# Altium PCB CAN Breakout.PcbDoc
Units mil, origin at the board's own origin, x right, y up, seen from the top; angles counter-clockwise.
Board outline 2734 x 2570 mil, 2 copper layers (Top Layer, Bottom Layer); 51 components, 25 nets, 122 pads, 33 vias.
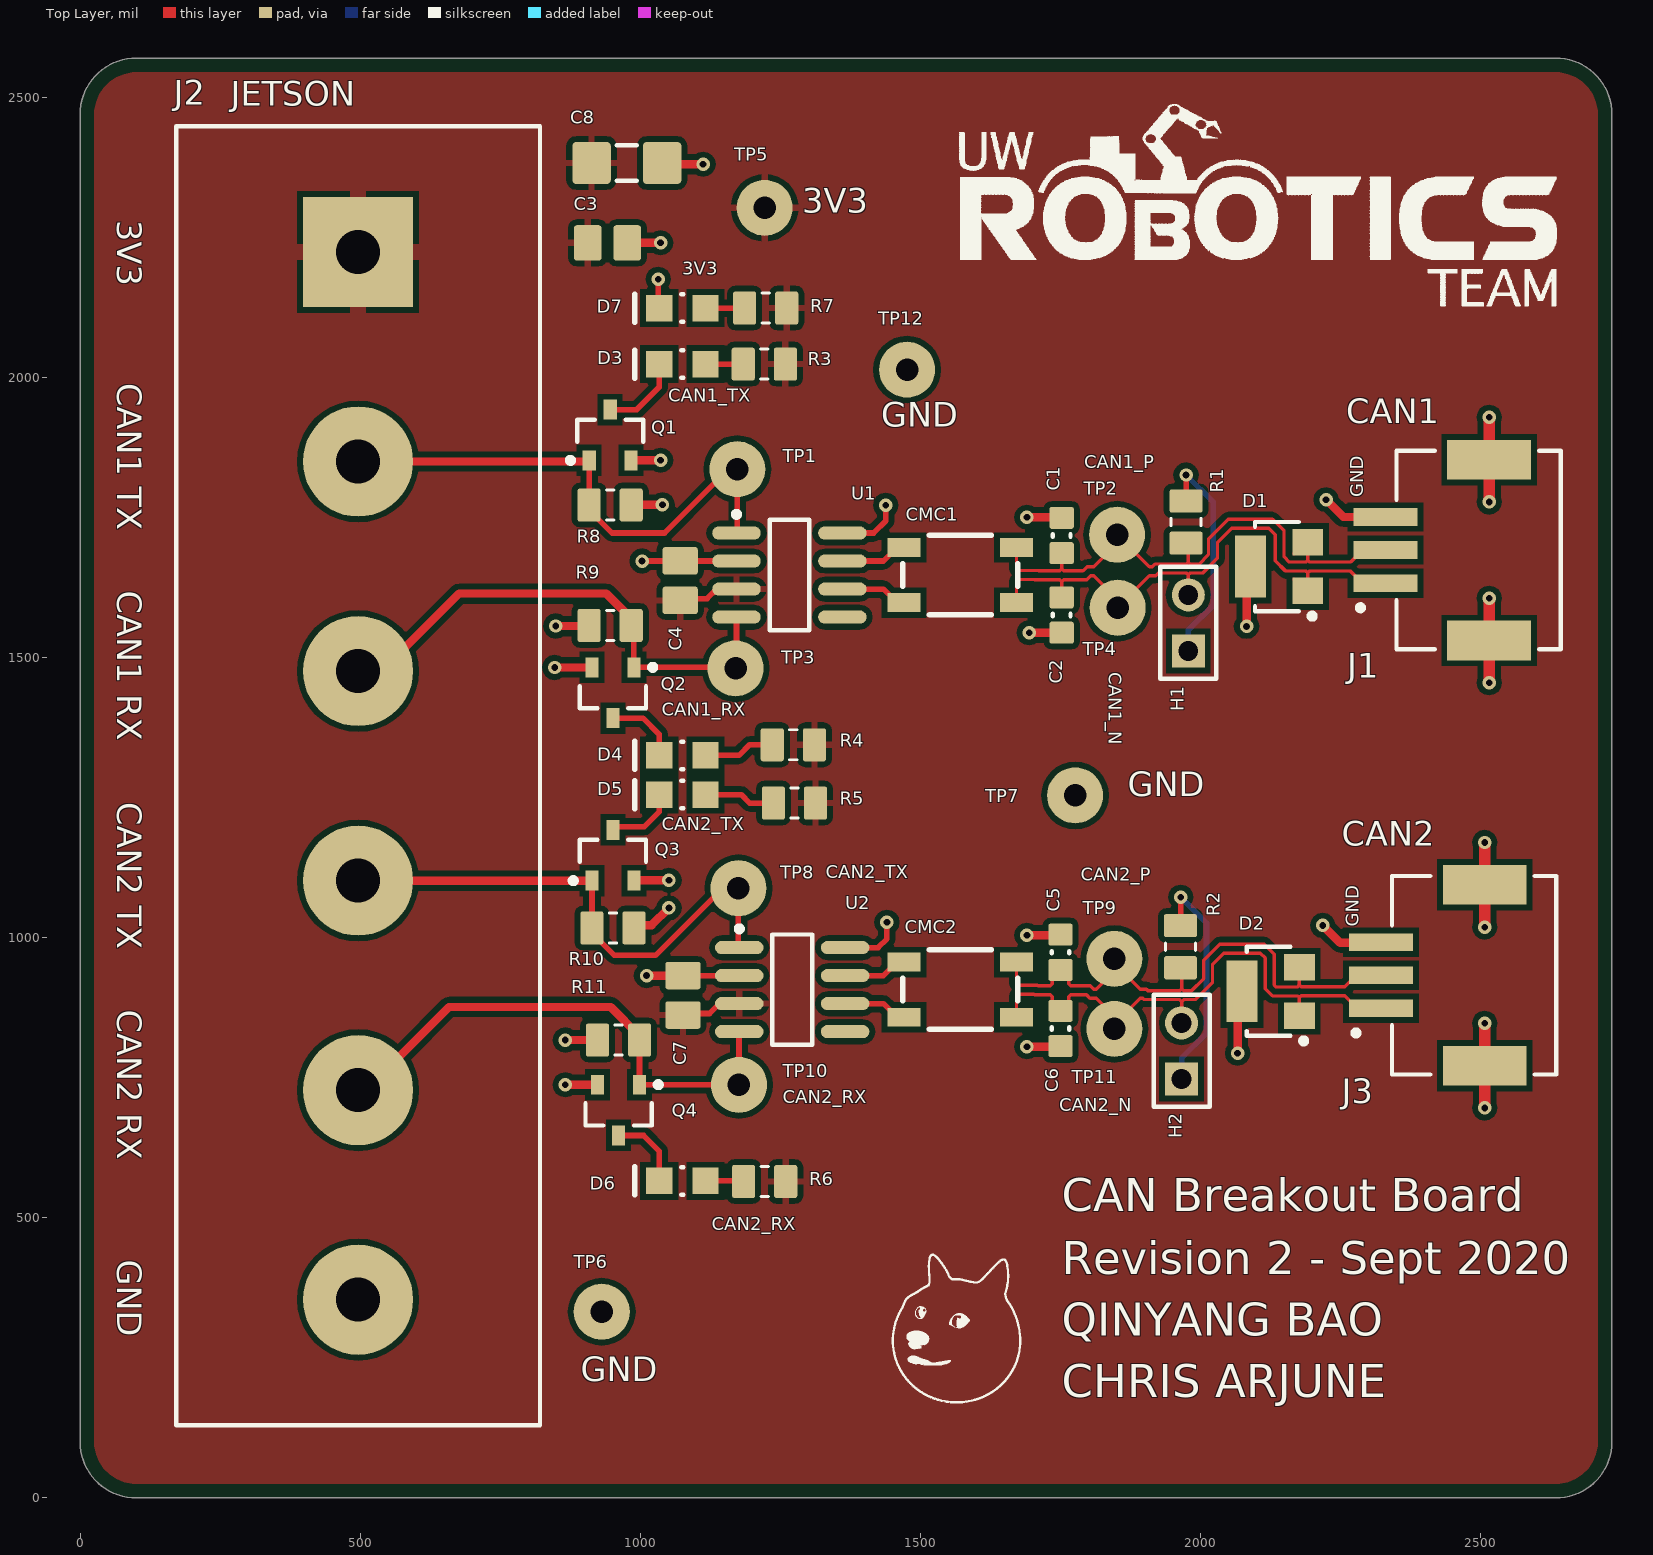
[diagram p0: Top Layer view]
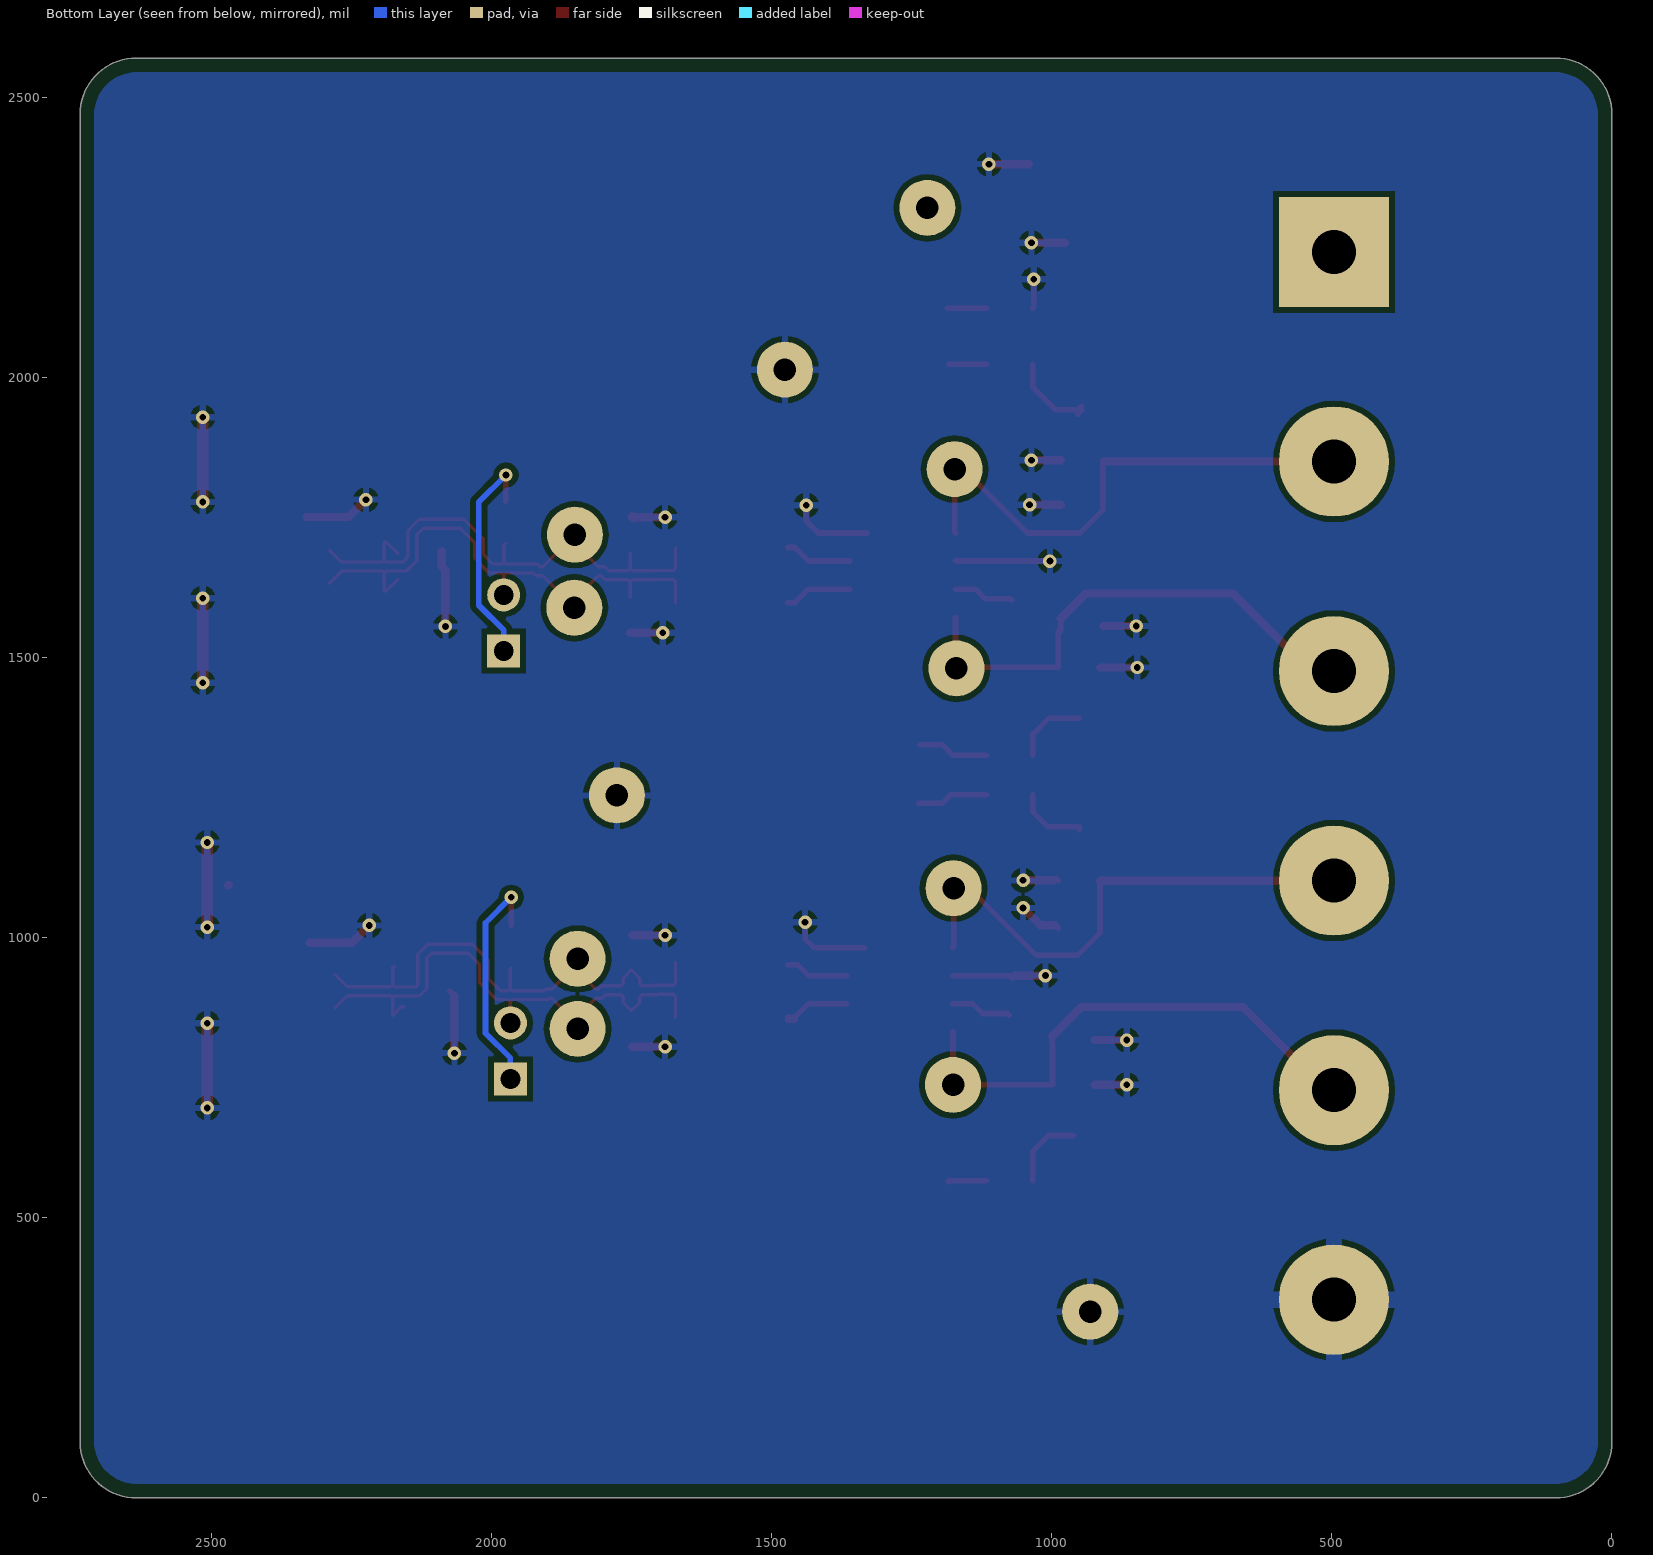
[diagram p1: Bottom Layer view, seen from below]
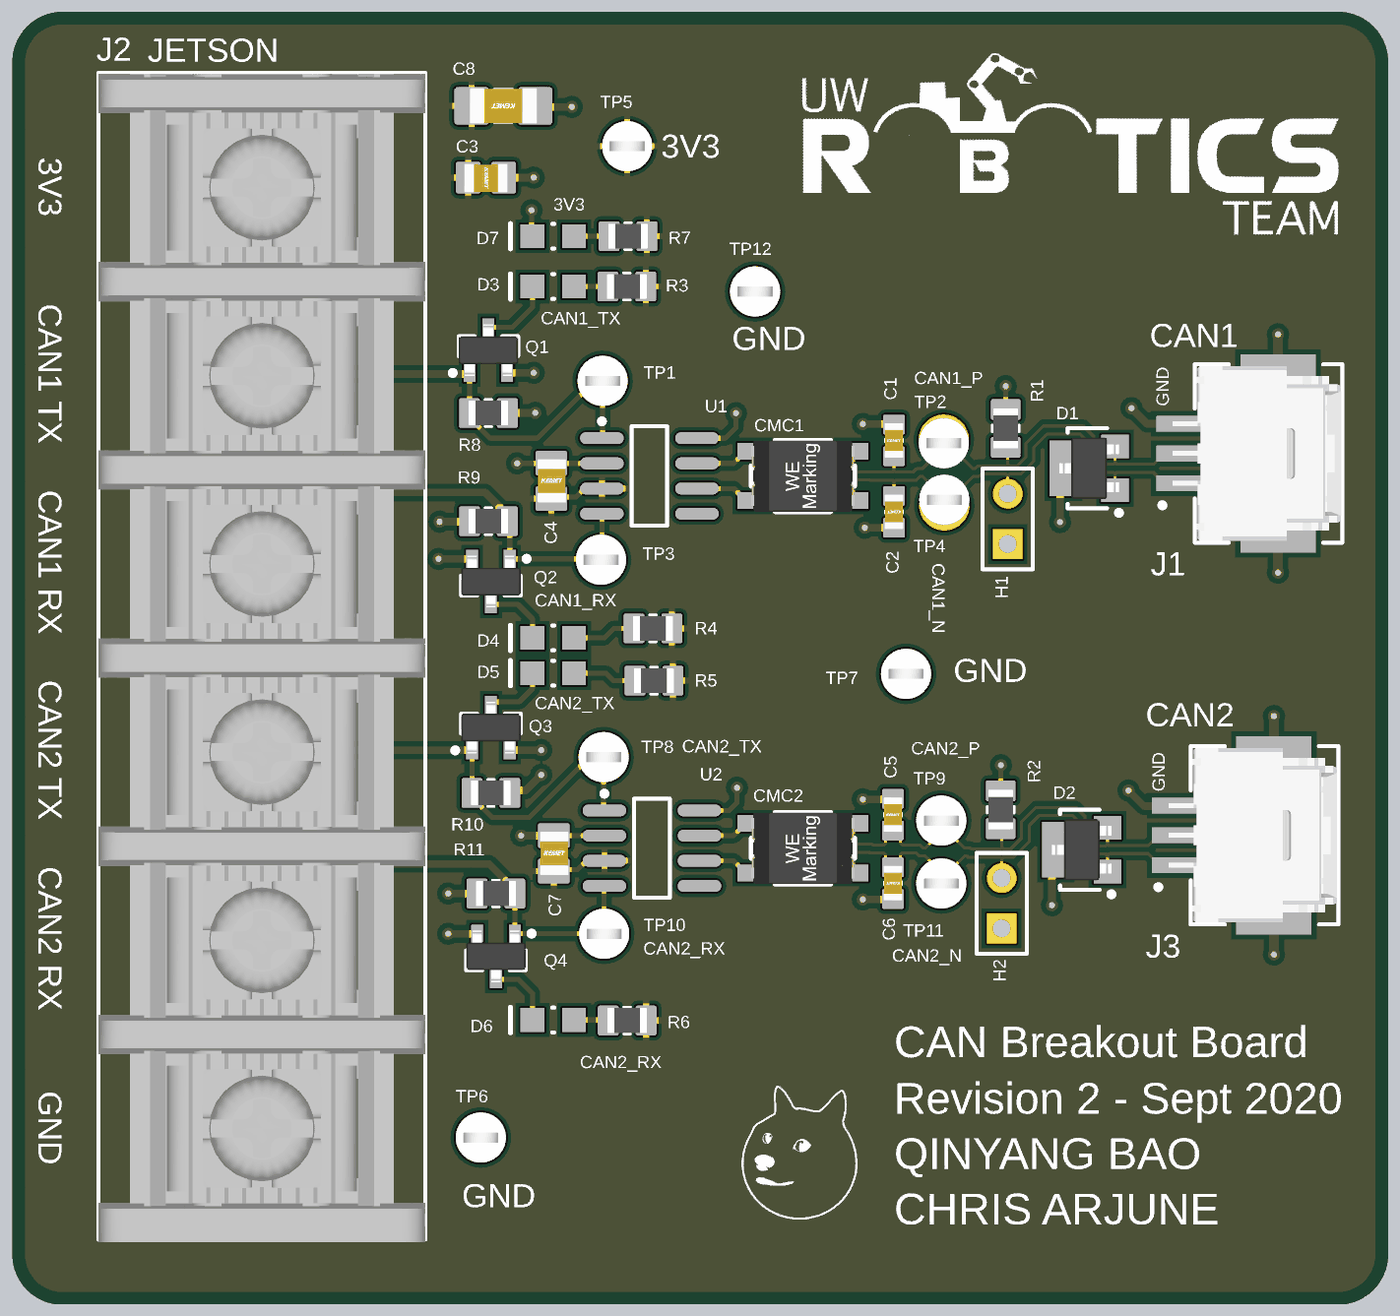
[diagram p2: 3D render of the assembled board from above, using the file's embedded part models]

## Layer stack, top to bottom
Top Solder: solder mask 0.4, Solder Resist, Dk 3.5
Top Layer: signal copper 1.4
Dielectric 1: dielectric 12.6, FR-4, Dk 4.8
Bottom Layer: signal copper 1.4
Bottom Solder: solder mask 0.4, Solder Resist, Dk 3.5

## Board outline
0,100 ccw(c100,100) 100,0 2634,0 ccw(c2634,100) 2734,100 2734,2470 ccw(c2634,2470) 2634,2570 100,2570 ccw(c100,2470) 0,2470

## Design rules (kind name [scope] priority, off if disabled: settings)
BoardOutlineClearance [All] p1: gap=25 ignorepadtopadclearanceinfootprint=FALSE except(0: Arc-SplitContinuation Track-SplitContinuation SMDPad-SplitContinuation THPad-SplitContinuation Via-SplitContinuation Fill-SplitContinuation Poly-SplitContinuation Region-SplitContinuation Text-SplitContinuation)
Clearance [All] p1: gap=10 ignorepadtopadclearanceinfootprint=FALSE except(0: Arc-Hole Track-Hole SMDPad-Hole THPad-Hole Via-Hole Fill-Hole Poly-Hole Region-Hole Text-Hole)
DiffPairsRouting [All] p1: maxlimit=10 minlimit=10 mostfreqgap=10 toplayer_minwidth=6 toplayer_maxwidth=6 toplayer_prefwidth=6 bottomlayer_minwidth=6 bottomlayer_maxwidth=6 bottomlayer_prefwidth=6 maxuncoupledlength=500
PolygonConnect PolygonConnect_J2 [InComponent('J2')] p1: connectstyle=Relief reliefconductorwidth=30 reliefentries=4 polygonreliefangle="90 Angle" airgapwidth=10
PolygonConnect [All] p2: connectstyle=Relief reliefconductorwidth=12 reliefentries=4 polygonreliefangle="90 Angle" airgapwidth=10
RoutingVias [All] p1: holewidth=28 width=50 viastyle="Through Hole" minholewidth=28 minwidth=50 maxholewidth=28 maxwidth=50
SilkToSilkClearance [All] p1: silktosilkclearance=2
SilkToSolderMaskClearance [IsPad] p1: minsilkscreentomaskgap=2 clearancetoexposedcopper=TRUE
SolderMaskExpansion [All] p1: expansion=4
Width [All] p1: maxlimit=100 minlimit=6 preferedwidth=10 minimp=50.000000 maximp=50.000000 favimp=50.000000
27 further rules are at their usual default settings.

## Classes and differential pairs
differential pair CAN2: +CAN2_P -CAN2_N
differential pair CAN1: +CAN1_P -CAN1_N

## Components (designator, comment, footprint, x,y, rotation, side; value= is the part's Value field where it differs from the comment)
C1 "CAP_33pF_50V_0603" CAPC0603(1608)55_N 1752,1718 r270 top value=33pF
C2 "CAP_33pF_50V_0603" CAPC0603(1608)55_N 1752,1576 r90 top value=33pF
C3 "0.1μF" CAPC2012X140N 941.24,2240.39 r180 top value=0.1µF
C4 "0.1μF" CAPC2012X140N 1071,1637.39 r270 top value=0.1µF
C5 "CAP_33pF_50V_0603" CAPC0603(1608)55_N 1750,974 r270 top value=33pF
C6 "CAP_33pF_50V_0603" CAPC0603(1608)55_N 1750,838 r90 top value=33pF
C7 "0.1μF" CAPC2012X140N 1076,897.15 r270 top value=0.1µF
C8 "10uF" CAPC1206(3216) 975.79,2382.89 r180 top value=10µF
CMC1 "*" 744212510 1571,1647.39 r0 top
CMC2 "*" 744212510 1571,907.39 r0 top
D1 "TVS_DIODE_CAN" TVS_DIODE_CAN 2140,1662.6 r180 top
D2 "TVS_DIODE_CAN" TVS_DIODE_CAN 2125,904.39 r180 top
D3 "LG R971-KN-1" LED_0805_LINE 1074.88,2023.89 r180 top
D4 "LS R976-NR-1" LED_0805_LINE 1074.88,1325.39 r180 top
D5 "LG R971-KN-1" LED_0805_LINE 1074.88,1255.39 r180 top
D6 "LS R976-NR-1" LED_0805_LINE 1074.88,565.89 r180 top
D7 "LS R976-NR-1" LED_0805_LINE 1074.88,2123.89 r180 top
H1 "JUMPER_2" HDR1X2 1978,1512 r90 top
H2 "JUMPER_2" HDR1X2 1966,748 r90 top
J1 "*" MOLEX-5025850370 2496.34,1692 r90 top
J2 "TERMINAL_6" OSTYK51106030 496,2017.39 r270 top
J3 "*" MOLEX-5025850370 2488.34,933.06 r90 top
Q1 "NMOS_60V_470mA" SOT23-3 946,1897.39 r90 top
Q2 "NMOS_60V_470mA" SOT23-3 951,1437.39 r270 top
Q3 "NMOS_60V_470mA" SOT23-3 951,1147.11 r90 top
Q4 "NMOS_60V_470mA" SOT23-3 961,692.39 r270 top
R1 "120" RESC2012X60N 1974,1742 r90 top
R2 "120" RESC2012X60N 1964,984 r90 top
R3 "120" RESC2012X60N 1221.14,2023.89 r0 top
R4 "120" RESC2012X60N 1273,1344.39 r0 top
R5 "120" RESC2012X60N 1275,1240.39 r0 top
R6 "120" RESC2012X60N 1221.79,564.89 r0 top
R7 "120" RESC2012X60N 1223.54,2123.89 r0 top
R8 "120" RESC2012X60N 946,1772.39 r180 top
R9 "120" RESC2012X60N 946,1557.39 r0 top
R10 "120" RESC2012X60N 951,1017.39 r180 top
R11 "120" RESC2012X60N 961,817.39 r0 top
TP1 "TESTPOINT_LOOP" TESTPOINT_LOOP#1 1173,1836.39 r0 top
TP2 "TESTPOINT_LOOP" TESTPOINT_LOOP#2 1851,1712.39 r0 top
TP3 "TESTPOINT_LOOP" TESTPOINT_LOOP#1 1169.79,1480.89 r0 top
TP4 "TESTPOINT_LOOP" TESTPOINT_LOOP#3 1852,1600 r0 top
TP5 "TESTPOINT_LOOP" TESTPOINT_LOOP#1 1221.79,2302.89 r0 top
TP6 "TESTPOINT_LOOP" TESTPOINT_LOOP#1 931,332.39 r0 top
TP7 "TESTPOINT_LOOP" TESTPOINT_LOOP#1 1776,1254 r0 top
TP8 "TESTPOINT_LOOP" TESTPOINT_LOOP#1 1175,1088.39 r0 top
TP9 "TESTPOINT_LOOP" TESTPOINT_LOOP#1 1846,962.39 r0 top
TP10 "TESTPOINT_LOOP" TESTPOINT_LOOP#1 1176,737.39 r0 top
TP11 "TESTPOINT_LOOP" TESTPOINT_LOOP#1 1846,837.39 r0 top
TP12 "TESTPOINT_LOOP" TESTPOINT_LOOP#1 1476,2014 r0 top
U1 "IC TXRX CAN" LT-S8_N 1266,1647.39 r0 top
U2 "IC TXRX CAN" LT-S8_N 1271,907.39 r0 top

## Footprints (in the part's own frame and the unit in brackets; to place one, negate y for a bottom-side part, rotate by r counter-clockwise, add the part's x,y. Pads: shape width x height; smd on the part's side, far side on the other; paste and mask are expansions set on the pad)
744212510 [mm] "CMC HORIZONTAL 4 J-LEAD"
  rect 1.5x0.85 smd: 1(-2.55,-1.25) 3(-2.55,1.25) 4(2.55,1.25) 5(2.55,-1.25)
  silkscreen extent -2.6,-1.8 2.6,1.8, body extent -2.6,-1.8 2.6,1.8, height 1.67
CAPC0603(1608)55_N [mm] "Chip Capacitor, Body 1.6x0.8mm, Height 0.55mm, IPC Medium Density"
  rrect20% 1x1.1 smd: 1(-0.8,0) 2(0.8,0)
  silkscreen extent -0.05,-0.4 0.05,0.4, body extent -0.87,-0.48 0.88,0.48, height 0.87
CAPC1206(3216) [mm] "Chip Capacitor, Body 3.2x1.6mm, Height 0.55mm, IPC Medium Density"
  rrect20% 1.75x1.9 smd: 1(-1.6,0) 2(1.6,0)
  silkscreen extent -0.45,-0.8 0.45,0.8, body extent -1.7,-0.9 1.7,0.9, height 0.88
CAPC2012X140N [mm]
  rrect20% 1.25x1.6 smd: 1(-0.895,0) 2(0.895,0)
  body extent -1.1,-0.7 1.1,0.75, height 1.41
HDR1X2 [mm] "Connector; Header; 2 Position"
  rect 1.5x1.5 hole 0.9: 1(0,0)
  round 1.5 hole 0.9: 2(2.54,0)
  silkscreen extent -1.27,-1.27 3.81,1.27
LED_0805_LINE [mm] "SMD, 2-Leads, Body 2x1.25mm"
  rect 1.2x1.2 smd: 1(-1.05,0) 2(1.05,0)
  silkscreen extent -0.05,-0.63 2.16,0.64, body extent -1,-0.63 1,0.63, height 0.8
LT-S8_N [mm] "SOP, 8-Leads, Body 4.9x3.9mm, Pitch 1.27mm, IPC Medium Density"
  oval 2.2x0.6 smd: 1(-2.4,1.905) 2(-2.4,0.635) 3(-2.4,-0.635) 4(-2.4,-1.905) 5(2.4,-1.905) 6(2.4,-0.635) 7(2.4,0.635) 8(2.4,1.905)
  silkscreen extent -2.52,-2.5 0.9,2.88, body extent -2,-2.5 2,2.5, height 1.76
MOLEX-5025850370 [mm]
  rect 1.8x3.8 smd paste+0 mask+0: 0(-4.1,-0.475) 0(4.1,-0.475)
  rect 0.8x2.9 smd paste+0 mask+0: 1(-1.5,4.225) 2(0,4.225) 3(1.5,4.225)
  silkscreen extent -4.5,-3.72 4.5,5.48, body extent -4.4,-3.67 4.4,4.83, height 6.4
OSTYK51106030 [mm] "Connector; Header; 6 Position"
  rect 5x5 hole 2: 1(-5.25,0)
  round 5 hole 2: 2(4.25,0) 3(13.75,0) 4(23.25,0) 5(32.75,0) 6(42.25,0)
  silkscreen extent -10.95,-8.25 47.95,8.25, body extent -10.91,-8.25 48.09,8.25, height 18.49
RESC2012X60N [mm]
  rrect20% 1.05x1.5 smd: 1(-0.955,0) 2(0.955,0)
  silkscreen extent -0.17,-0.68 0.17,0.68, body extent -1,-0.62 1,0.62, height 0.6
SOT23-3 [mm] "SOT23, 3-Leads, Body 2.90x2.30mm, Pitch 0.95mm, IPC Medium Density"
  rect 0.9x0.6 smd: 1(-1.15,0.95) 2(-1.15,-0.95) 3(1.15,0)
  silkscreen extent -1.27,-1.5 0.7,1.92, body extent -1.3,-1.5 1.3,1.5, height 1.1
TESTPOINT_LOOP#1 [mm]
  round 2.54 hole 1.02: 1(0,0)
  body extent -1.27,-1.27 1.27,1.27, height 4.57
TESTPOINT_LOOP#2 [mm]
  round 2.54 hole 1.02: 1(0,0.178)
  body extent -1.27,-1.27 1.27,1.27, height 4.57
TESTPOINT_LOOP#3 [mm]
  round 2.54 hole 1.02: 1(0,-0.279)
  body extent -1.27,-1.27 1.27,1.27, height 4.57
TVS_DIODE_CAN [mm] "SOT23, 3-Leads, Body 2.95x2.80mm, Pitch 0.95mm, IPC Low Density"
  rect 1.4x1.2 smd: 1(-1.3,1.1) 2(-1.3,-1.1)
  rect 1.4x2.8 smd: 3(1.3,0)
  silkscreen extent -1.63,-2.02 1.09,2.37, body extent -1.5,-1.55 1.5,1.55, height 1.25

## Part data
C1 C2 C5 C6: "CAP CER 33PF 50V C0G/NP0", Case Code (Imperial)=0603, Case Code (Metric)=1608, Dielectric="C0G, NP0", Dielectric Material=Ceramic, Insulation Resistance=100GR, Manufacturer 1=Yageo, Manufacturer Part Number 1=CC0603JRNPO9BN330, Max Operating Temperature=125°C, Min Operating Temperature=-55°C, Supplier Part Number 1=311-1064-1-ND, Temperature Coefficient=30ppm/°C, Tolerance=5%, Voltage=50V, ComponentLink7Description=https://datasheet.ciiva.com/11464/upy-gp-np0-16v-to-50v-8-11464730.pdf?src-supplier=Avnet, ComponentLink7URL=https://datasheet.ciiva.com/11464/upy-gp-np0-16v-to-50v-8-11464730.pdf?src-supplier=Avnet, ComponentLink8Description=https://datasheet.ciiva.com/46430/1835847-46430155.pdf?src-supplier=Element14, ComponentLink8URL=https://datasheet.ciiva.com/46430/1835847-46430155.pdf?src-supplier=Element14, ComponentLink9Description=https://datasheet.ciiva.com/144/mlccorderingcode-144644.pdf?src-supplier=Digi-Key, ComponentLink9URL=https://datasheet.ciiva.com/144/mlccorderingcode-144644.pdf?src-supplier=Digi-Key, ComponentLink10Description=https://datasheet.ciiva.com/5426/upy-gp-np0-16v-to-50v-8-5426614.pdf?src-supplier=Mouser, ComponentLink10URL=https://datasheet.ciiva.com/5426/upy-gp-np0-16v-to-50v-8-5426614.pdf?src-supplier=Mouser, ComponentLink11Description=https://datasheet.ciiva.com/7978/1443161-7978142.pdf?src-supplier=Element14, ComponentLink11URL=https://datasheet.ciiva.com/7978/1443161-7978142.pdf?src-supplier=Element14, Composition=Ceramic, Depth=0.8mm, Height=0.8mm, Length=1.6mm, Mount="Surface Mount", Number of Pins=2, Package=0603, REACH SVHC="No SVHC", Supplier 1=Digi-Key, Termination=SMD/SMT, Thickness=0.035inch, Voltage Rating=50V, Voltage Rating (DC)=50V, Width=0.031inch
C3 C4 C7: library part CAP_0.1uF_50V_0805, "CAP CER 0.1UF 50V X7R 0805", Case Code (Imperial)=0805, Case Code (Metric)=2012, Dielectric=X7R, Manufacturer 1="Murata Electronics", Manufacturer Part Number 1=GCD21BR71H104KA01L, Max Operating Temperature=125°C, Min Operating Temperature=-55°C, Package="0805 (2012 Metric)", Ratings=AEC-Q200, Supplier Part Number 1=490-11955-1-ND, Tolerance=10%, Voltage Rating=50V, Depth=1.25mm, Height=1.25mm, Length=2mm, Mount="Surface Mount", Supplier 1=Digi-Key, Termination=SMD/SMT, Thickness=0.049inch, Width=0.049inch
C8: library part CAP_10uF_50V_1206, "CAP CER 10UF 50V X5R 1206", Case Code (Imperial)=1206, Case Code (Metric)=3216, Dielectric=X5R, Manufacturer 1=Murata, Manufacturer Part Number 1=GRT31CR61H106KE01L, Package="1206 (3216 Metric)", Supplier Part Number 1=490-12456-1-ND, Voltage Rating=50V, Dimensions="0.126\" L x 0.063\" W (3.20mm x 1.6mm)", Manufacturer Part Numer 1=GRT31CR61H106KE01L, Mount="Surface Mount", Supplier 1=Digi-Key
CMC1 CMC2: library part CMC_51uH, "CMC 51uH 300MA 2LN SMD", Case/Package=SMD/SMT, Current=300mA, DC Resistance (DCR)=160mR, Inductance=51uH, Inductance Tolerance=50%, Manufacturer 1="Wurth Electronics", Manufacturer Part Number 1=744212510, Max Operating Temperature=105°C, Min Operating Temperature=-40°C, Supplier Part Number 1=732-3941-1-ND, Test Frequency=100kHz, Voltage Rating (DC)=80V, ComponentLink7Description=https://datasheet.ciiva.com/6216/744212510-6216348.pdf?src-supplier=Digi-Key, ComponentLink7URL=https://datasheet.ciiva.com/6216/744212510-6216348.pdf?src-supplier=Digi-Key, ComponentLink8Description=https://datasheet.ciiva.com/7764/1735560-7764951.pdf?src-supplier=Element14, ComponentLink8URL=https://datasheet.ciiva.com/7764/1735560-7764951.pdf?src-supplier=Element14, Core Material=Ferrite, Current Rating=300mA, Depth=3.6mm, Height=1.65mm, Impedance=300R, Length=6.5mm, Max DC Current=300mA, Mount="Surface Mount", Number of Lines=2, Number of Pins=4, REACH SVHC="No SVHC", Supplier 1=Digi-Key, Termination=SMD/SMT, Tolerance=50%, Width=0.142inch
D1 D2: "TVS DIODE 24V 41V SOT323-3", Manufacturer 1="Nexperia USA Inc.", Manufacturer Part Number 1=PESD2CAN,215, Package="SC-70, SOT-323", Supplier Part Number 1=1727-3891-1-ND, Mount="Surface Mount", Supplier 1=Digi-Key
D3 D5: library part DIO_LED_G, "LED GREEN DIFFUSED 0805 SMD", Forward Voltage Drop=2.2V, Manufacturer 1=OSRAM, Package="0805 (2012 Metric)", Supplier Part Number 1=475-1410-1-ND, Manufacturer Part Number 1="LG R971-KN-1", Mount="Surface Mount", Supplier 1=Digi-Key
D4 D6 D7: library part DIO_LED_R, "LED RED DIFFUSED 0805 SMD", Forward Voltage Drop=2V, Manufacturer 1=OSRAM, Package="0805 (2012 Metric)", Supplier Part Number 1=475-1278-1-ND, Manufacturer Part Number 1="LS R976-NR-1", Mount="Surface Mount", Supplier 1=Digi-Key
H1 H2: "HEADER 2X1", Manufacturer 1="TE Connectivity", Manufacturer Part Number 1=87220-2, Supplier Part Number 1=A26542-ND, Mount="Through Hole", Supplier 1=Digi-Key
J1 J3: "CONN RCPT 3POS 0.059 TIN SMD R/A", Color=Beige, Contact Resistance=20mR, Current Rating=2A, Manufacturer 1=Molex, Max Operating Temperature=85°C, Min Operating Temperature=-40°C, Supplier Part Number 1=WM12831CT-ND, Voltage Rating=100V, Category="Headers and Wire Housings", Connector Type="Receptacle,Center Strip Contact", Contact Gender=Female, Contact Material="Copper Alloy", Contact Plating=Tin, Depth=7.3mm, Fastening Type=Latch, Gender=Female, Glow Wire Compliant=Non-compliant, Housing Color=Beige, Housing Material=Thermoplastic, Length=8.8mm, Mount="Surface Mount", Number of Circuits=3, Number of Contacts=3, Number of Positions=3, Number of Rows=1, Orientation="Right Angle", Pitch=1.5mm, Pricing 2="1=0.53000, 10=0.50100, 100=0.38380, 500=0.33374 (USD)", REACH SVHC="No SVHC", Stock 2=133, Supplier 1=Digi-Key, Termination=Solder
J2: "Header, 6-Pin", Color=Black, Current Rating=30A, Flammability Rating="UL94 V-0", Manufacturer 1="On-Shore Technology", Manufacturer Part Number 1=OSTYK51106030, Max Operating Temperature=115°C, Min Operating Temperature=-40°C, Supplier Part Number 1=ED2957-ND, Voltage Rating=300V, ComponentLink1Description=http://www.on-shore.com/wp-content/uploads/2015/09/ostyk511xx030.pdf?src-supplier=Digi-Key, ComponentLink1URL=http://www.on-shore.com/wp-content/uploads/2015/09/ostyk511xx030.pdf?src-supplier=Digi-Key, Insulation Material=Nylon, Mount="Through Hole", Number of Circuits=6, Number of Rows=1, Number of Wire Entries=6, Packaging=Bulk, Pitch=0.374inch, Pricing 1="1=2.56000, 10=1.93600, 25=1.79440, 50=1.61340, 100=1.57400, 250=1.37724, 500=1.25920, 1000=1.14115, 5000=1.00343 (USD)", RoHS=Yes, Stock 1=2939, Supplier 1=Digi-Key, Wire Gauge (Max)=22AWG, Wire Gauge (Min)=10AWG
Q1 Q2 Q3 Q4: "MOSFET N-CH 60V SOT23", Case/Package=TO-236-3, Continuous Drain Current (ID)=470mA, Drain to Source Voltage (Vdss)=60V, Input Capacitance=12.9pF, Manufacturer 1=Diodes, Manufacturer Part Number 1=DMN61D8LQ-7, Max Operating Temperature=150°C, Max Power Dissipation=390mW, Min Operating Temperature=-55°C, Supplier Part Number 1=DMN61D8LQ-7DICT-ND, ComponentLink1Description=http://www.farnell.com/datasheets/2814413.pdf?src-supplier=Farnell, ComponentLink1URL=http://www.farnell.com/datasheets/2814413.pdf?src-supplier=Farnell, ComponentLink2Description=http://www.mouser.com/ds/2/115/DMN61D8LQ-776439.pdf?src-supplier=Mouser, ComponentLink2URL=http://www.mouser.com/ds/2/115/DMN61D8LQ-776439.pdf?src-supplier=Mouser, ComponentLink3Description=https://www.diodes.com/assets/Datasheets/DMN61D8LQ.pdf?src-supplier=Digi-Key, ComponentLink3URL=https://www.diodes.com/assets/Datasheets/DMN61D8LQ.pdf?src-supplier=Digi-Key, Mount="Surface Mount", Packaging="Tape and Reel", Pricing 1="1=0.44000, 10=0.37900, 25=0.35360, 100=0.26260, 500=0.20504, 1000=0.16665 (USD)", Rds On Max=1.8R, RoHS=Yes, Stock 1=72, Supplier 1=Digi-Key
R1 R2 R3 R4 R5 R6 R7 R8 R9 R10 R11: library part RES_120O_0805, "RES SMD 120 OHM 1% 1/8W 0805", Case Code (Imperial)=0805, Case Code (Metric)=2012, Manufacturer 1=Vishay, Manufacturer Part Number 1=CRCW0805120RFKEA, Package="0805 (2012 Metric)", Power Rating=125mW, Resistance=120O, Supplier Part Number 1=541-120CCT-ND, Voltage Rating=150V, ComponentLink7Description=https://datasheet.ciiva.com/2467/dcrcwe3-2467513.pdf?src-supplier=Digi-Key, ComponentLink7URL=https://datasheet.ciiva.com/2467/dcrcwe3-2467513.pdf?src-supplier=Digi-Key, ComponentLink8Description=https://datasheet.ciiva.com/16852/dcrcwe3-16852841.pdf?src-supplier=Avnet+Europe, ComponentLink8URL=https://datasheet.ciiva.com/16852/dcrcwe3-16852841.pdf?src-supplier=Avnet+Europe, ComponentLink9Description=https://datasheet.ciiva.com/7777/1697337-7777354.pdf?src-supplier=Element14, ComponentLink9URL=https://datasheet.ciiva.com/7777/1697337-7777354.pdf?src-supplier=Element14, ComponentLink10Description=https://datasheet.ciiva.com/16788/70201119-16788154.pdf?src-supplier=Allied+Electronics, ComponentLink10URL=https://datasheet.ciiva.com/16788/70201119-16788154.pdf?src-supplier=Allied+Electronics, ComponentLink11Description=https://datasheet.ciiva.com/7777/1720486-7777567.pdf?src-supplier=Element14, ComponentLink11URL=https://datasheet.ciiva.com/7777/1720486-7777567.pdf?src-supplier=Element14, Mount="Surface Mount", Supplier 1=Digi-Key
TP1 TP2 TP3 TP4 TP5 TP6 TP7 TP8 TP9 TP10 TP11 TP12: "PC TEST POINT MINIATURE WHITE", Manufacturer 1="Keystone Electronics", Manufacturer Part Number 1=5002, Supplier Part Number 1=36-5002-ND, Mount="Through Hole", Supplier 1=Digi-Key
U1 U2: library part LTC2875, "IC TXRX CAN 4MBPS 8SO", Manufacturer 1="Linear Technologies", Manufacturer Part Number 1=LTC2875IS8#PBF, Package="8-SOIC (0.154\", 3.90mm Width)", Supplier Part Number 1=LTC2875IS8#PBF-ND, Mount="Surface Mount", Supplier 1=Digi-Key

## Via types
v1: diameter 24, hole 12, Top Layer to Bottom Layer, tented both sides, 33 vias

## Nets (pads, with @x,y where several pads share a name; then routed paths per layer and width w, separated by ;. In a path a pad name is that pad's centre, name@x,y a point inside that pad or via, vN(x,y) a via of type N, cw(c..) or ccw(c..) an arc to the next point about the centre after c; other vN are vias at no path point)
3V3: C3.2 C4.2 C7.2 C8.2 J2.1 R3.2 R4.2 R5.2 R6.2 R7.2 TP5.1 U1.3 U2.3 | length 217.9
  Top Layer w10: C4.2 1074.12,1605.27 1119.21,1605.27 1136.33,1622.39 U1.3 ; C7.2 1078.77,864.68 1123.3,864.68 1141,882.39 U2.3
CAN1_N: C2.2 CMC1.5 D1.1 H1.2 J1.1 TP4.1 | length 971.3
  Top Layer w6: CMC1.5 1671.39,1635.87 1674.91,1639.39 1703.5,1639.39 1703.89,1639 1748.49,1639 1752,1635.49 ; C2.2 1752,1635.49 ; TP4.1 TP4.1@1852,1589.5 ; H1.2 1978,1647.51 ; D1.1@2166.62,1639.91 2187.24,1619.29 D1.1 2191.18,1651.08 ; J1.1@2288.96,1632.94 2267.3,1654.6 2194.7,1654.6 2191.18,1651.08 ; 1752,1635.49 1755.51,1639 1796.78,1639 1803.97,1646.19 1808.94,1646.19 1852,1603.14 TP4.1@1852,1589.5 ; TP4.1@1852,1589.5 1908.69,1646.19 1920.33,1646.19 1925.17,1651.03 1974.49,1651.03 1978,1647.51 ; 1978,1647.51 1981.51,1651.03 2003.76,1651.03 2030.04,1677.31 2030.04,1704.88 2055.88,1730.72 2121.76,1730.72 2132.92,1719.56 2132.92,1673.19 2151.51,1654.6 2187.67,1654.6 2191.18,1651.08
CAN1_P: C1.2 CMC1.4 D1.2 J1.2 R1.1 TP2.1 | length 972
  Top Layer w6: CMC1.4 1671.39,1658.9 1674.91,1655.39 1710.13,1655.39 1710.52,1655 1748.49,1655 1752,1658.51 ; C1.2 1752,1658.51 ; R1.1 1978,1700.4 1978,1670.54 ; D1.2@2166.62,1685.28 2187.24,1705.9 D1.2 2191.18,1674.11 ; J1.2@2288.96,1692 2267.55,1670.6 2194.7,1670.6 2191.18,1674.11 ; 1752,1658.51 1755.51,1655 1790.15,1655 1797.35,1662.19 1808.94,1662.19 1851,1704.25 TP2.1 1851.5,1719.39 1908.69,1662.19 1913.7,1662.19 1918.54,1667.03 1974.49,1667.03 1978,1670.54 ; 1978,1670.54 1981.51,1667.03 1997.13,1667.03 2014.04,1683.94 2014.04,1711.51 2049.25,1746.72 2128.39,1746.72 2148.92,1726.19 2148.92,1679.81 2158.14,1670.6 2187.67,1670.6 2191.18,1674.11
CAN1_RX: J2.3 Q2.1 R9.2 TP3.1 U1.4 | length 925.6
  Top Layer w10: R9.2@983.6,1547.39 R9.2 R9.2@983.6,1569.79 ; R9.2@988.4,1547.19 Q2.1 1169.74,1482.66 1171.51,1480.89 U1.4
  Top Layer w15: J2.3 538.05,1476.05 676.39,1614.39 939,1614.39 R9.2@983.6,1569.79
CAN1_TX: J2.2 Q1.1 R8.2 TP1.1 U1.1 | length 945.6
  Top Layer w10: Q1.1@906.55,1850.06 Q1.1 908.6,1772.58 R8.2 908.4,1763.53 949.54,1722.39 1043,1722.39 1145,1824.39 1161,1824.39 TP1.1 1173,1723.87 U1.1
  Top Layer w15: J2.2 Q1.1@906.55,1850.06
CAN2_N: C6.2 CMC2.5 D2.1 H2.2 J3.1 TP11.1 | length 967.8
  Top Layer w6: CMC2.5 1671.39,895.87 1674.91,899.39 1702,899.39 1703.39,898 1731.71,898 1735.23,894.49 1735.23,884.27 C6.2 1764.77,884.27 1764.77,894.49 1768.29,898 1796.32,898 1802.43,891.89 1814.03,891.89 1846,859.91 TP11.1@1846,845.99 ; TP11.1 TP11.1@1846,845.99 ; H2.2 1966,886.1 ; D2.1@2156.69,876.69 2160.57,876.69 D2.1 2176.18,892.87 ; 2179.7,896.39 2176.18,892.87 ; 2180.7,896.6 2257.3,896.6 J3.1@2278.96,874.94 ; TP11.1@1846,845.99 1891.89,891.89 1896.86,891.89 1899.14,889.62 1962.49,889.62 1966,886.1 ; 1966,886.1 1969.51,889.62 1990.34,889.62 2021.27,920.54 2021.27,952.9 2040.88,972.5 2106.76,972.5 2115.37,963.89 2115.37,908.89 2128.26,896 2173.05,896 2176.18,892.87
CAN2_P: C5.2 CMC2.4 D2.2 J3.2 R2.1 TP9.1 | length 946.9
  Top Layer w6: CMC2.4 1671.39,918.9 1674.91,915.39 1708.63,915.39 1710.02,914 1731.71,914 1735.23,917.51 1735.23,927.73 C5.2 1764.77,927.73 1764.77,917.51 1768.29,914 1802.94,914 1809.06,907.89 1814.03,907.89 1846,939.86 TP9.1@1846,953.78 ; TP9.1 TP9.1@1846,953.78 ; R2.1 1966,944.4 1966,909.13 ; D2.2@2172.24,947.69 D2.2 2176.18,915.9 ; J3.2@2278.96,934 2257.55,912.6 2179.48,912.6 2176.18,915.9 ; TP9.1@1846,953.78 1891.89,907.89 1903.49,907.89 1905.76,905.62 1962.49,905.62 1966,909.13 ; 1966,909.13 1969.51,905.62 1983.72,905.62 2005.27,927.16 2005.27,959.52 2034.25,988.5 2113.39,988.5 2131.37,970.52 2131.37,915.51 2134.89,912 2172.28,912 2176.18,915.9
CAN2_RX: J2.5 Q4.1 R11.2 TP10.1 U2.4 | length 945.6
  Top Layer w10: R11.2@998.6,824.79 R11.2 998.6,807.39 998.4,807.19 Q4.1 998.68,737.39 TP10.1 1176,831.87 U2.4
  Top Layer w15: J2.5 510.02,728.02 658.39,876.39 947,876.39 R11.2@998.6,824.79
CAN2_TX: J2.4 Q3.1 R10.2 TP8.1 U2.1 | length 934.3
  Top Layer w10: Q3.1@913.4,1102.03 Q3.1 913.6,1017.58 R10.2 913.4,1008.53 953.54,968.39 1027,968.39 1135,1076.39 1171,1076.39 1175,1080.39 1175,983.9 U2.1
  Top Layer w15: J2.4 Q3.1@913.4,1102.03
GND: C1.1 C2.1 C3.1 C4.1 C5.1 C6.1 C7.1 C8.1 D1.3 D2.3 D7.2 J1.0 J1.3 J2.6 J3.0 J3.3 Q1.2 Q2.2 Q3.2 Q4.2 R8.1 R9.1 R10.1 R11.1 TP6.1 TP7.1 TP12.1 U1.2 U1.8 U2.2 U2.8 | length 2648.2
  Top Layer w10: v1@861,817.39 v1(866,817.39) ; R9.1@907.4,1556.39 R9.1 ; Q2.2@913.32,1482.39 Q2.2 ; Q4.2@923.32,737.39 Q4.2 ; Q1.2 Q1.2@983.68,1852.39 ; Q3.2 992.66,1106.09 Q3.2@996.37,1102.39 ; R10.1 R10.1@993.6,1022.39 ; v1(1003,1672.39) 1070.76,1672.39 C4.1 1071.24,1672.39 U1.2 ; v1(1031.7,2175.51) 1031.7,2125.73 D7.2 ; C8.1 C8.1@1040.79,2380.89 ; v1@1038.93,1772.39 v1(1039.25,1772.71) ; C7.1@1066,932.39 1071,927.39 C7.1 U2.2 ; U1.8@1328.99,1722.39 U1.8 1416.39,1722.39 1438,1744 v1(1438,1772) ; U2.8@1333.99,982.39 U2.8 1424.39,982.39 1440,998 v1(1440,1027.7) ; v1@1686,805.5 v1(1690,805.5) ; v1@1688,1541.5 1691.01,1544.5 v1(1694,1544.5) ; C6.1@1748.99,805.5 C6.1 ; C5.1@1749.01,1004.5 C5.1 ; C1.1@1748.99,1752.5 C1.1 ; D2.3@2066,896.57 D2.3
  Top Layer w15: v1(847,1482.39) Q2.2@913.32,1482.39 ; v1(849,1556.39) R9.1@907.4,1556.39 ; v1(866,737.39) Q4.2@923.32,737.39 ; v1(866,817.39) R11.1 ; C3.1 v1(1036,2240.39) ; R8.1 983.92,1772.71 1038.61,1772.71 v1@1038.93,1772.39 ; Q1.2@983.68,1852.39 v1(1036,1852.39) ; R10.1@993.6,1022.39 1020.14,1022.39 v1(1051,1053.24) ; Q3.2@996.37,1102.39 v1@1039,1102.39 ; v1(1011,932.39) C7.1@1066,932.39 ; C8.1@1040.79,2380.89 v1(1111.79,2380.89) ; v1(1690,805.5) C6.1@1748.99,805.5 ; v1(1690,1004.5) C5.1@1749.01,1004.5 ; v1(1690,1750.5) 1742.99,1750.5 1744.99,1748.5 C1.1@1748.99,1752.5 ; v1(1694,1544.5) C2.1 ; v1(2066,794) D2.3@2066,896.57 ; v1(2082,1555.73) 2082,1655.78 D1.3 D1.3@2088.82,1690.16 ; v1(2218,1022) 2248.94,991.06 J3.3@2324,991.06 ; v1(2224,1782) 2254.94,1751.06 J1.3 ; J3.0@2468.72,1093.42 J3.0@2469.59,1093.42
  Top Layer w20: v1(2507.04,696.11) 2507.04,771.64 v1(2507.04,847.17) ; v1(2507.04,1018.94) 2507.04,1094.47 v1(2507.04,1170) ; v1(2515.04,1455.06) 2515.04,1530.58 v1(2515.04,1606.11) ; v1(2515.04,1777.89) 2515.04,1853.42 v1(2515.04,1928.94)
  other v1: 1051,1102.39
NetCMC1_1: CMC1.1 U1.6 | length 120.1
  Top Layer w10: U1.6 1433.6,1622.39 1457.81,1598.17 CMC1.1
NetCMC1_3: CMC1.3 U1.7 | length 120.1
  Top Layer w10: U1.7 1433.6,1672.39 1457.81,1696.6 CMC1.3
NetCMC2_1: CMC2.1 U2.6 | length 127.9
  Top Layer w10: U2.6 1433.6,882.39 1457.81,858.17 CMC2.1 ; CMC2.1@1457.81,853.17 CMC2.1@1470.61,853.17
NetCMC2_3: CMC2.3 U2.7 | length 113.1
  Top Layer w10: U2.7 1433.6,932.39 1452.81,951.6 CMC2.3@1470.61,951.6
NetD3_1: D3.1 R3.1 | length 67.3
  Top Layer w10: D3.1 R3.1
NetD3_2: D3.2 Q1.3 | length 164.6
  Top Layer w10: Q1.3@946.22,1948.79 Q1.3@952.35,1942.66 ; Q1.3@952.81,1934.89 946,1941.7 Q1.3 Q1.3@952.35,1942.66 ; D3.2 1033.54,1982.64 993.57,1942.66 Q1.3@952.35,1942.66
NetD4_1: D4.1 R4.1 | length 127.1
  Top Layer w10: D4.1 1176,1325.39 1195,1344.39 R4.1
NetD4_2: D4.2 Q2.3 | length 132.3
  Top Layer w10: Q2.3 1004.57,1392.11 1033.54,1363.14 D4.2
NetD5_1: D5.1 R5.1 | length 127.4
  Top Layer w10: D5.1 1180,1255.39 1195,1240.39 R5.1
NetD5_2: D5.2 Q3.3 | length 130.1
  Top Layer w10: Q3.3 951,1198.29 1007.2,1198.29 1033.54,1224.64 D5.2
NetD6_1: D6.1 R6.1 | length 68.4
  Top Layer w10: D6.1 1183.2,565.89 R6.1
NetD6_2: D6.2 Q4.3 | length 137.4
  Top Layer w10: Q4.3 961.22,646.89 1005.79,646.89 1033.54,619.14 D6.2
NetD7_1: D7.1 R7.1 | length 69.7
  Top Layer w10: D7.1 R7.1
NetH1_1: H1.1 R1.2 | length 401
  Top Layer w10: R1.2 v1(1974,1826) ; H1.1@1976.57,1510.57 H1.1
  Bottom Layer w10: v1(1974,1826) 2022.53,1777.47 2022.53,1593.56 1978,1549.03 H1.1
NetH2_1: H2.1 R2.2 | length 412.9
  Top Layer w6: R2.2 R2.2@1964.57,1022.17
  Top Layer w10: R2.2@1964.57,1022.17 v1(1964.57,1072.4)
  Bottom Layer w10: v1(1964.57,1072.4) 2010.53,1026.44 2010.53,829.49 1966,784.96 H2.1
pads on no net: U1.5 U2.5

## Polygon pours and split planes (outlines as drawn)
GND on Bottom Layer "Bottom Layer-GND" (solid, pour order 12): -0.21,2567.89 2733.79,2567.89 2733.79,-1.11 -0.21,-1.11
3V3 on Top Layer "Top Layer-3V3" (solid, pour order 14): 0,-3.29 2760.52,-3.29 2760.52,2572.71 0,2572.71

## Silkscreen, mask and mechanical layers (free items; w line width, h text height)
Top Overlay:
  drawing of 21 lines, arcs and shapes, not listed
  text "JETSON" at 268.65,2470.87 h75
  text "3V3" at 52.04,2280.78 h75 r270
  text "3V3" at 1289.13,2280 h75
  text "3V3" at 1075,2175 h40
  text "CAN1 TX" at 52,1989.69 h75 r270
  text "CAN1_TX" at 1050,1949 h40
  text "CAN1" at 2260,1904 h75
  text "GND" at 1430,1898 h75
  text "CAN1_P" at 1792,1830 h40
  text "GND" at 2298,1786 h40 r90
  text "CAN1 RX" at 52,1619.4 h75 r270
  text "CAN1_N" at 1828,1474 h40 r270
  text "CAN1_RX" at 1038,1388 h40
  text "CAN2 TX" at 52,1241.66 h75 r270
  text "GND" at 1870,1238 h75
  text "CAN2_TX" at 1038,1184 h40
  text "CAN2" at 2252,1150 h75
  text "CAN2_TX" at 1330.61,1098.14 h40
  text "CAN2_P" at 1786,1094 h40
  text "GND" at 2290,1020 h40 r90
  text "CAN2 RX" at 52,871.37 h75 r270
  text "CAN2_RX" at 1253.79,696.14 h40
  text "CAN2_N" at 1748,682 h40
  text "CAN Breakout Board" at 1752,492 h100
  text "CAN2_RX" at 1127.79,470.14 h40
  text "GND" at 52,424.87 h75 r270
  text "Revision 2 - Sept 2020" at 1752,380 h100
  text "QINYANG BAO" at 1752,270 h100
  text "GND" at 893.13,194 h75
  text "CHRIS ARJUNE" at 1752,160 h100
Board Outline:
  the board outline again, w5